# EAGLE board LTC_Balancer (EAGLE 5.06)
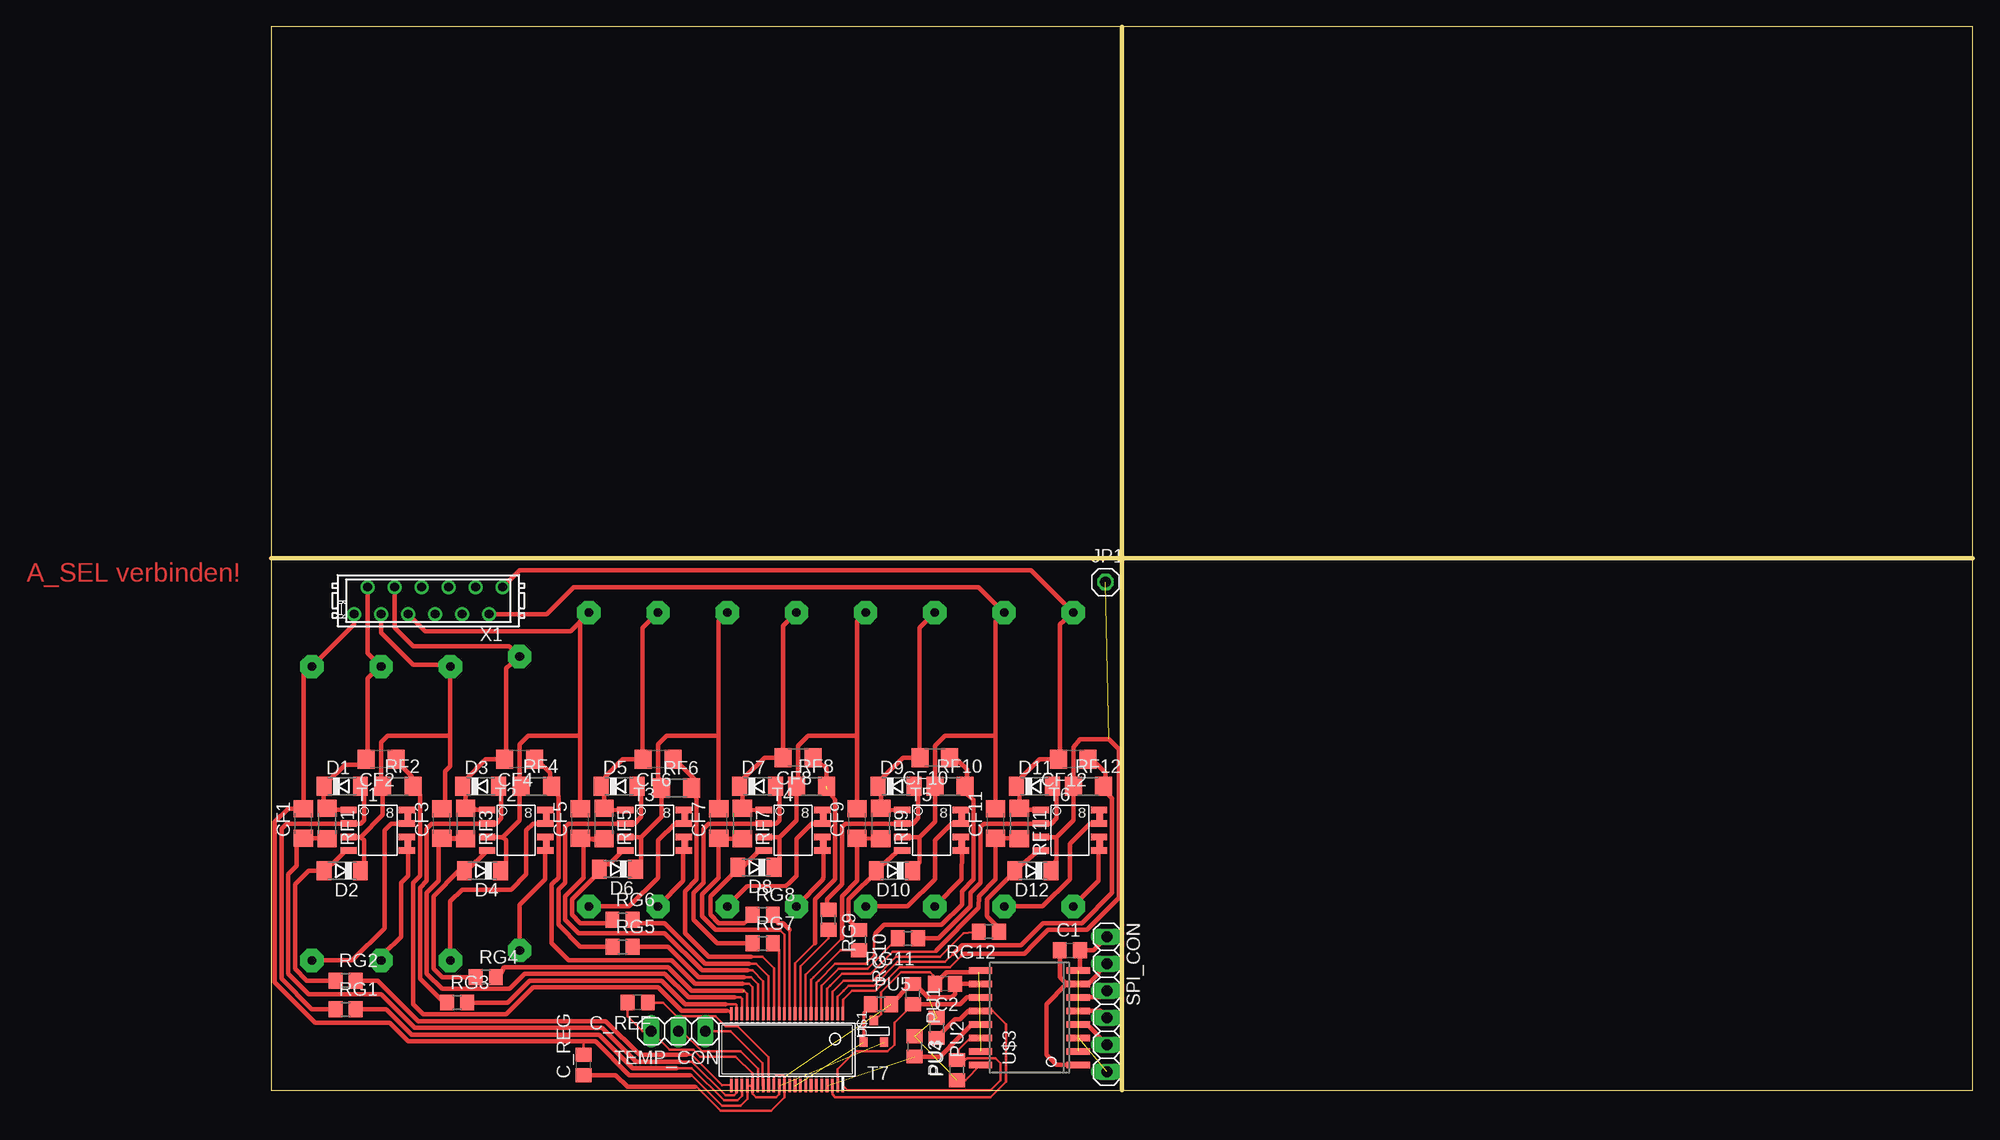
[diagram p0: board, top side]
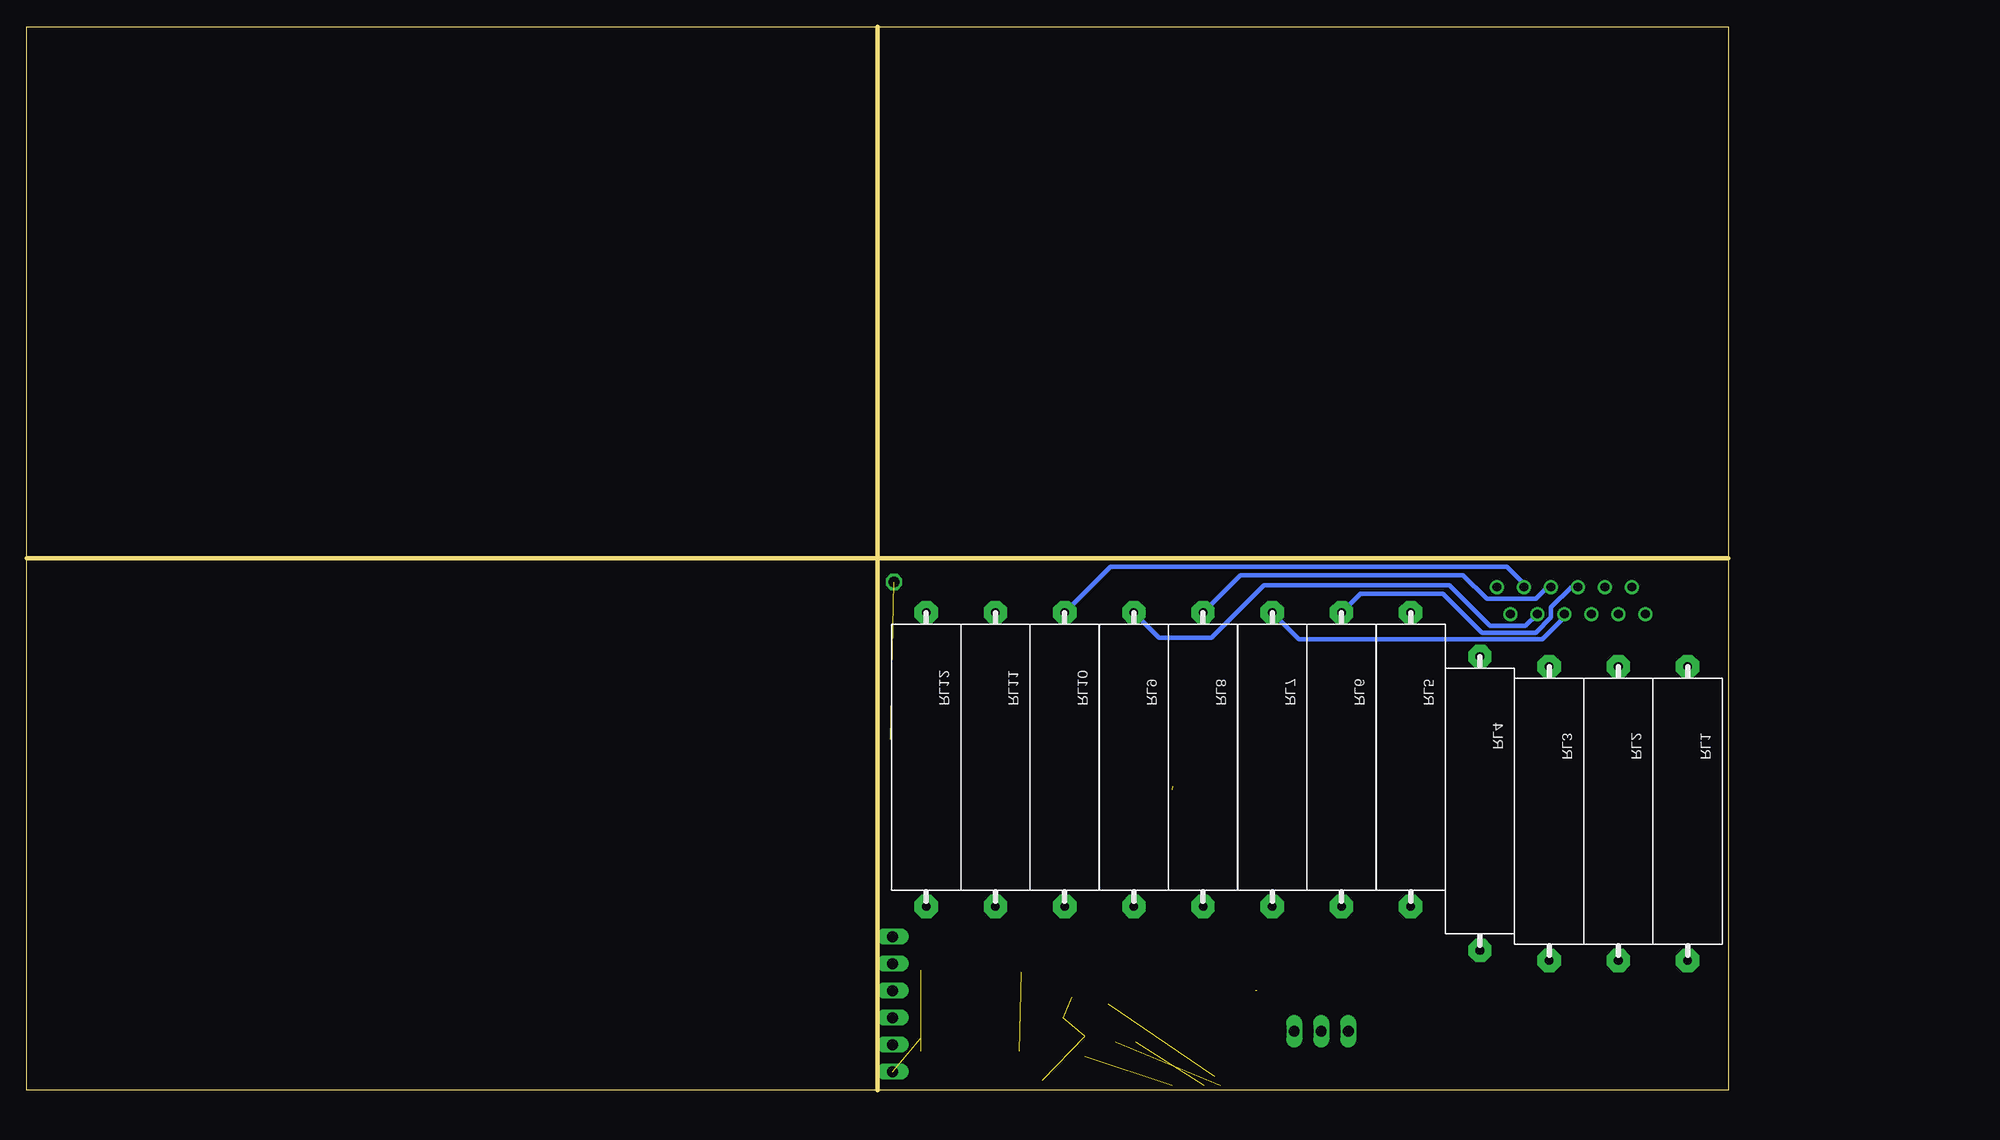
[diagram p1: board, bottom side, seen from below]

Size 160 x 100 mm. Coordinates in mm from the lower left corner, seen from the top.
Outline: 80,0 0,0 0,50
Outline: 80,0 160,0 160,50
Outline: 160,50 160,100 80,100
Outline: 80,100 0,100 0,50
Outline: 80,100 80,0
Outline: 0,50 160,50
Copper layers (1*16): Top 0.035mm / dielectric 1.5mm / Bottom 0.035mm
Design rules "default": minimum track width 10mil, minimum drill 24mil, track to track 8mil, track to pad 8mil, pad to pad 8mil, via to via 8mil, smd to smd 8mil, copper to edge 40mil, drill to drill 8mil, minimum pad ring 10mil, minimum via ring 8mil, stop-mask expansion 4mil, vias tented up to drill 0mil, thermal gap 10mil

## Footprints (pad centres in the part's own frame; a part is rotated, then mirrored left to right if it is on the bottom)
C0805 = smd 1.3 x 1.5: 1 -0.95,0; 2 0.95,0
C1206 = smd 1.6 x 1.8: 1 -1.4,0; 2 1.4,0
SOD80C = smd 1.4 x 1.8: A 1.7,0; C -1.7,0
1X01 = drill 1.016 octagon: 1 0,0
R0805 = smd 1.3 x 1.5: 1 -0.95,0; 2 0.95,0
R1206 = smd 1.6 x 1.803: 1 -1.422,0; 2 1.422,0
R_5W = drill 0.813 pad 2.184 octagon: 1 0.46,0; 2 28.08,0
1X06 = drill 1.016 long: 1 -6.35,0; 2 -3.81,0; 3 -1.27,0; 4 1.27,0; 5 3.81,0; 6 6.35,0
SO8 = smd 1.524 x 0.61: 1 1.067,4.445; 2 1.067,3.175; 3 1.067,1.905; 4 1.067,0.635; 5 6.553,0.635; 6 6.553,1.905; 7 6.553,3.175; 8 6.553,4.445 | smd 0.61 x 1.524: 9 6.635,3.703; 10 6.635,1.203
SOT-23 = smd 0.787 x 0.889: 1 0.025,-1.016; 2 -0.94,1.016; 3 0.991,1.016
1X03 = drill 1.016 long: 1 -2.54,0; 2 0,0; 3 2.54,0
SSOP44DL = smd 0.25 x 1.25: 1 1.1,0.435; 2 1.6,0.435; 3 2.1,0.435; 4 2.6,0.435; 5 3.1,0.435; 6 3.6,0.435; 7 4.1,0.435; 8 4.6,0.435; 9 5.1,0.435; 10 5.6,0.435; 11 6.1,0.435; 12 6.6,0.435; 13 7.1,0.435; 14 7.6,0.435; 15 8.1,0.435; 16 8.6,0.435; 17 9.1,0.435; 18 9.6,0.435; 19 10.1,0.435; 20 10.6,0.435; 21 11.1,0.435; 22 11.6,0.435; 23 11.6,7.185; 24 11.1,7.185; 25 10.6,7.185; 26 10.1,7.185; 27 9.6,7.185; 28 9.1,7.185; 29 8.6,7.185; 30 8.1,7.185; 31 7.6,7.185; 32 7.1,7.185; 33 6.6,7.185; 34 6.1,7.185; 35 5.6,7.185; 36 5.1,7.185; 37 4.6,7.185; 38 4.1,7.185; 39 3.6,7.185; 40 3.1,7.185; 41 2.6,7.185; 42 2.1,7.185; 43 1.6,7.185; 44 1.1,7.185
SO16 = smd 0.6 x 2.2: 1 1.905,1.75; 2 3.175,1.75; 3 4.445,1.75; 4 5.715,1.75; 5 6.985,1.75; 6 8.255,1.75; 7 9.525,1.75; 8 10.795,1.75; 9 10.795,10.95; 10 9.525,10.95; 11 8.255,10.95; 12 6.985,10.95; 13 5.715,10.95; 14 4.445,10.95; 15 3.175,10.95; 16 1.905,10.95
MICROMATCH-12 = drill 0.813 round: 1 6.985,1.27; 2 5.715,-1.27; 3 4.445,1.27; 4 3.175,-1.27; 5 1.905,1.27; 6 0.635,-1.27; 7 -0.635,1.27; 8 -1.905,-1.27; 9 -3.175,1.27; 10 -4.445,-1.27; 11 -5.715,1.27; 12 -6.985,-1.27

## Placement (x,y rotation side)
C1  100n  [C0805]  75.09,13.18 0 top
C2  100n  [C0805]  63.34,10 180 top
C_REF  1u  [C0805]  34.45,8.25 180 top
C_REG  1u  [C0805]  29.37,2.38 90 top
CF1  100n  [C1206]  3.02,25.08 90 top
CF2  100n  [C1206]  10.32,31.11 180 top
CF3  100n  [C1206]  16.03,25.08 90 top
CF4  100n  [C1206]  23.34,31.11 180 top
CF5  100n  [C1206]  29.05,25.08 90 top
CF6  100n  [C1206]  36.35,31.11 180 top
CF7  100n  [C1206]  42.07,25.08 90 top
CF8  100n  [C1206]  49.53,31.27 180 top
CF9  100n  [C1206]  55.09,25.08 90 top
CF10  100n  [C1206]  62.39,31.27 180 top
CF11  100n  [C1206]  68.1,25.08 90 top
CF12  100n  [C1206]  75.41,31.11 180 top
D1  [SOD80C]  6.67,28.57 0 top
D2  [SOD80C]  6.67,20.64 180 top
D3  [SOD80C]  19.68,28.57 0 top
D4  [SOD80C]  19.84,20.64 180 top
D5  [SOD80C]  32.7,28.57 0 top
D6  [SOD80C]  32.54,20.8 180 top
D7  [SOD80C]  45.72,28.57 0 top
D8  [SOD80C]  45.56,20.95 180 top
D9  [SOD80C]  58.74,28.57 0 top
D10  [SOD80C]  58.58,20.64 180 top
D11  [SOD80C]  71.75,28.57 0 top
D12  [SOD80C]  71.6,20.64 180 top
JP1  [1X01]  78.42,47.78 0 top
PU1  10k  [R0805]  60.33,9.05 270 top
PU2  100k  [R0805]  62.55,5.87 270 top
PU3  100k  [R0805]  60.48,4.13 270 top
PU4  100k  [R0805]  64.45,1.91 90 top
PU5  100k  [R0805]  57.31,8.1 0 top
RF1  100  [R1206]  5.24,25.08 270 top
RF2  100  [R1206]  11.91,28.57 0 top
RF3  100  [R1206]  18.26,25.08 270 top
RF4  100  [R1206]  24.92,28.57 0 top
RF5  100  [R1206]  31.27,25.08 270 top
RF6  100  [R1206]  38.1,28.42 0 top
RF7  100  [R1206]  44.29,25.08 270 top
RF8  100  [R1206]  50.8,28.57 0 top
RF9  100  [R1206]  57.31,25.08 270 top
RF10  100  [R1206]  63.82,28.57 0 top
RF11  100  [R1206]  70.33,25.08 270 top
RF12  100  [R1206]  76.83,28.57 0 top
RG1  3k3  [R0805]  6.99,7.62 0 top
RG2  3k3  [R0805]  6.99,10.32 0 top
RG3  3k3  [R0805]  17.46,8.26 0 top
RG4  3k3  [R0805]  20.16,10.64 0 top
RG5  3k3  [R0805]  33.02,13.49 0 top
RG6  3k3  [R0805]  33.02,16.03 0 top
RG7  3k3  [R0805]  46.2,13.81 0 top
RG8  3k3  [R0805]  46.2,16.51 0 top
RG9  3k3  [R0805]  52.39,16.03 270 top
RG10  3k3  [R0805]  55.24,14.13 270 top
RG11  3k3  [R0805]  59.85,14.29 180 top
RG12  3k3  [R0805]  67.47,14.92 180 top
RL1  R_5W  [R_5W]  3.81,11.75 90 top
RL2  R_5W  [R_5W]  10.32,11.75 90 top
RL3  R_5W  [R_5W]  16.83,11.75 90 top
RL4  R_5W  [R_5W]  23.34,12.7 90 top
RL5  R_5W  [R_5W]  29.85,16.83 90 top
RL6  R_5W  [R_5W]  36.35,16.83 90 top
RL7  R_5W  [R_5W]  42.86,16.83 90 top
RL8  R_5W  [R_5W]  49.37,16.83 90 top
RL9  R_5W  [R_5W]  55.88,16.83 90 top
RL10  R_5W  [R_5W]  62.39,16.83 90 top
RL11  R_5W  [R_5W]  68.9,16.83 90 top
RL12  R_5W  [R_5W]  75.41,16.83 90 top
SPI_CON  [1X06]  78.58,8.1 270 top
T1  IRF_7104  [SO8]  6.19,21.91 0 top
T2  IRF_7104  [SO8]  19.21,21.91 0 top
T3  IRF_7104  [SO8]  32.23,21.91 0 top
T4  IRF_7104  [SO8]  45.24,21.91 0 top
T5  IRF_7104  [SO8]  58.26,21.91 0 top
T6  IRF_7104  [SO8]  71.28,21.91 0 top
T7  [SOT-23]  56.67,5.56 180 top
TEMP_CON  [1X03]  38.26,5.56 180 top
U$1  LTC6802-2  [SSOP44DL]  54.85,7.63 180 top
U$3  ADUM1401  [SO16]  77.63,0.48 90 top
X1  MICROMATCH-12  [MICROMATCH-12]  14.76,46.04 180 top

## Library data of the parts
C1 C2 C_REF C_REG CF1-CF12 PU1-PU5 RF1-RF12 RG1-RG12 = rcl
D1-D12 = diode
JP1 SPI_CON TEMP_CON = pinhead
RL1-RL12 = R_Power
T1-T6 = IRF_7104
T7 = zetex
U$1 = LTC6802
U$3 = ADuM1401
X1 = con-amp-micromatch

## Nets
+5V: C2.1 C_REG.1 PU1.1 PU2.1 PU3.1 PU4.1 PU5.2 U$1.31 U$1.33 U$3.10 U$3.16
A0: U$1.37
A1: U$1.38
A2: U$1.39
A3: U$1.40
ASD: RL5.1 T3.7
BK2: CF2.2 D1.C RF1.1 RL2.2 T1.1 X1.2
BK3: CF3.2 D2.C RF2.1 RL3.2 T1.3 X1.3
BK4: CF4.2 D3.C RF3.1 RL4.2 T2.1 X1.4
BK5: CF5.2 D4.C RF4.1 RL5.2 T2.3 X1.5
BK6: CF6.2 D5.C RF5.1 RL6.2 T3.1 X1.6
BK7: CF7.2 D6.C RF6.1 RL7.2 T3.3 X1.7
BK8: CF8.2 D7.C RF7.1 RL8.2 T4.1 X1.8
BK9: CF9.2 D8.C RF8.1 RL9.2 T4.3 X1.9
BK10: CF10.2 D9.C RF9.1 RL10.2 T5.1 X1.10
BK11: CF11.2 D10.C RF10.1 RL11.2 T5.3 X1.11
BK12: CF12.2 D11.C RF11.1 RL12.2 T6.1 X1.12
C1: CF1.1 RF1.2 U$1.24
C2: CF2.1 RF2.2 U$1.22
C3: CF3.1 RF3.2 U$1.20
C4: CF4.1 RF4.2 U$1.18
C5: CF5.1 RF5.2 U$1.16
C6: CF6.1 RF6.2 U$1.14
C7: CF7.1 RF7.2 U$1.12
C8: CF8.1 RF8.2 U$1.10
C9: CF9.1 RF9.2 U$1.8
C10: CF10.1 RF10.2 U$1.6
C11: CF11.1 RF11.2 U$1.4
C12: CF12.1 RF12.2 U$1.2
CS: SPI_CON.6 U$3.3
CSBI: PU4.2 U$1.44 U$3.14
GND_MC: C1.2 SPI_CON.1 U$3.2 U$3.8
GPIO1: PU5.1 T7.3 U$1.35
MISO: SPI_CON.3 U$3.6
MOSI: SPI_CON.4 U$3.5
N$2: TEMP_CON.1 U$1.29
N$3: C_REF.1 U$1.30
N$4: TEMP_CON.2 U$1.28
N$5: RL3.1 T2.7
N$6: RL4.1 T2.5
N$7: C2.2 T7.1 U$3.9 U$3.15
N$8: RL1.1 T1.7
N$9: RL2.1 T1.5
N$10: RL6.1 T3.5
N$11: RL7.1 T4.7
N$12: RL8.1 T4.5
N$13: RL9.1 T5.7
N$14: RL10.1 T5.5
N$15: RL11.1 T6.7
N$16: RL12.1 T6.5
N$17: D1.A RG1.1 T1.2
N$23: D2.A RG2.1 T1.4
N$55: D3.A RG3.1 T2.2
N$56: D4.A RG4.1 T2.4
N$57: D5.A RG5.1 T3.2
N$58: D7.A RG7.1 T4.2
N$59: D6.A RG6.1 T3.4
N$60: D8.A RG8.1 T4.4
N$61: D9.A RG9.1 T5.2
N$62: D10.A RG10.1 T5.4
N$63: D11.A RG11.1 T6.2
N$64: D12.A RG12.1 T6.4
S1: RG1.2 U$1.25
S2: RG2.2 U$1.23
S3: RG3.2 U$1.21
S4: RG4.2 U$1.19
S5: RG5.2 U$1.17
S6: RG6.2 U$1.15
S7: RG7.2 U$1.13
S8: RG8.2 U$1.11
S9: RG9.2 U$1.9
S10: RG10.2 U$1.7
S11: RG11.2 U$1.5
S12: RG12.2 U$1.3
SCK: SPI_CON.5 U$3.4
SCKI: PU3.2 U$1.41 U$3.13
SDI: PU2.2 U$1.42 U$3.12
SDO: PU1.2 U$1.43 U$3.11
V+: D12.C JP1.1 RF12.1 T6.3 U$1.1
V-: C_REF.2 C_REG.2 CF1.2 RL1.2 T7.2 TEMP_CON.3 U$1.26 U$1.27 U$1.32 X1.1
VCC_MC: C1.1 SPI_CON.2 U$3.1 U$3.7

## Tracks (layer width: path | path; a pad name or v marks a point on that pad's centre or on a via)
+5V  (4 unrouted)
  Top 0.254: PU4.1 65.25,0.95 U$3.16 | U$1.31 47.25,1.21 47.47,1.43 48.1,1.43 48.25,1.28 U$1.33 48.25,-0.62 48.26,-0.64 46.99,-1.91 42.23,-1.91 40.01,0.32 39.85,0.32
  Top 0.406: C2.1 U$3.10 | C2.1 | C2.1 64.29,9.05 63.98,8.73 61.75,8.73 60.49,10 PU1.1 60.16,10 PU5.2 | C_REG.1 32.38,1.43 33.5,0.32 39.85,0.32
ASD
  Top 0.406: RL5.1 33.64,17.29 36.35,20 36.35,23.5 37.94,25.08 T3.7
BK2
  Top 0.406: T1.1 5.07,26.35 RF1.1 5.09,26.5 4.92,26.67 4.92,28.46 D1.C 4.81,28.59 6.51,30.16 6.96,30.61 8.73,30.61 CF2.2 9.05,31.25 9.05,38.73 10.14,39.83 RL2.2 9.05,41.1 X1.2
BK3
  Top 0.406: 8.41,23.81 10.48,25.88 RF2.1 10.17,29.06 10.32,29.21 10.32,32.7 10.95,33.34 16.83,33.34 | 8.41,23.81 T1.3 | 8.41,23.81 8.73,23.5 8.73,21.16 D2.C | 16.83,33.34 16.83,30.48 16.35,30 16.35,26.83 16.03,26.51 CF3.2 | 16.83,33.34 RL3.2 16.65,40.01 14.92,40.01 13.34,40.01 10.32,43.02 X1.3
BK4
  Top 0.406: T2.1 19.21,26.35 19.06,26.5 RF3.1 18.26,27.62 18.14,28.05 D3.C 18.26,28.69 18.26,29.21 20.16,31.11 CF4.2 22.07,31.3 22.07,39.69 23.34,40.8 RL4.2 22.36,41.75 13.34,41.75 11.59,43.5 X1.4
BK5
  Top 0.406: 21.75,23.81 T2.3 | 21.75,23.81 22.07,23.5 22.07,20.84 D4.C | 21.75,23.81 23.34,25.4 23.34,28.41 RF4.1 23.5,29.06 23.34,29.21 | 23.34,29.21 23.65,28.89 | 23.34,29.21 23.34,32.54 24.13,33.34 29.05,33.34 | 29.05,33.34 29.05,29.53 CF5.2 | 29.05,33.34 29.05,43.97 29.84,44.93 RL5.2 28.12,43.18 14.45,43.18 X1.5
BK6
  Top 0.406: RL6.2 36.35,44.93 34.92,43.5 34.92,31.4 CF6.2 33.02,31.11 31.43,29.53 31.43,28.85 D5.C 31.32,28.21 31.27,27.78 RF5.1 31.9,26.35 32.54,26.35 T3.1
  Bottom 0.406: X1.6 14.76,47.31 16.67,45.4 16.67,44.45 18.1,43.02 23.18,43.02 26.83,46.67 34.59,46.67 RL6.2
BK7
  Top 0.406: D6.C 34.56,21.39 34.77,21.59 34.77,23.81 | 34.77,23.81 T3.3 | 34.77,23.81 36.68,25.72 RF6.1 36.84,29.06 36.35,29.37 36.35,32.54 37.15,33.34 42.07,33.34 | RL7.2 42.7,44.77 42.07,44.13 42.07,33.34 | 42.07,33.34 CF7.2
  Bottom 0.406: X1.7 15.4,44.45 17.46,42.39 40.34,42.39 RL7.2
BK8
  Top 0.406: T4.1 45.88,26.35 44.93,26.35 RF7.1 44.29,28.1 44.18,28.05 D7.C 44.45,28.85 44.45,29.37 46.35,31.27 CF8.2 48.13,43.67 RL8.2
  Bottom 0.406: X1.8 16.99,47.31 18.1,46.2 22.7,46.2 24.92,48.42 45.86,48.42 RL8.2
BK9
  Top 0.406: 47.78,23.81 49.38,25.41 RF8.1 49.38,29.06 49.53,29.21 49.53,32.38 50.48,33.34 55.09,33.34 | 47.78,23.81 T4.3 | 47.78,23.81 47.78,21.32 D8.C | 55.09,33.34 55.09,26.64 CF9.2 | 55.09,33.34 55.09,44.11 RL9.2
  Bottom 0.406: X1.9 | X1.9 19.05,43.66 22.38,43.66 26.19,47.47 43.66,47.47 48.58,42.55 53.52,42.55 RL9.2
BK10
  Top 0.406: RL10.2 62.37,44.91 60.96,43.5 60.96,31.25 CF10.2 59.37,31.27 57.47,29.37 57.15,29.16 D9.C 57.51,28.69 57.31,28.1 RF9.1 57.95,26.35 59.21,26.35 T5.1
  Bottom 0.406: X1.10 19.21,47.62 20.8,49.21 58.08,49.21 RL10.2
BK11
  Top 0.406: 60.96,23.81 62.4,25.25 RF10.1 62.24,28.74 62.39,28.89 62.39,32.38 63.34,33.34 68.1,33.34 | 60.96,23.81 T5.3 | D10.C 60.44,21.23 60.96,21.43 60.96,23.81 | 68.1,33.34 CF11.2 | 68.1,33.34 68.1,44.11 RL11.2 66.5,47.31 28.42,47.31 25.88,44.77 X1.11
BK12
  Top 0.406: T6.1 70.8,26.35 RF11.1 70.33,27.99 D11.C 70.21,29.1 72.23,31.11 CF12.2 74.14,31.09 74.14,43.81 75.39,44.91 RL12.2 73.01,47.31 73.03,47.31 71.44,48.9 23.34,48.9 X1.12 | X1.12
C1
  Top 0.254: 38.42,2.7 39.53,2.7 42.7,-0.48 43.5,-0.48 43.75,-0.23 U$1.24
  Top 0.406: RF1.2 4.9,23.68 CF1.1 2.38,23.5 2.38,21.11 1.59,20.32 1.59,10.95 3.33,9.21 3.49,9.05 10.32,9.05 13.49,5.87 31.11,5.87 34.29,2.7 38.42,2.7
C2
  Top 0.254: 42.86,7.46 42.98,7.46 U$1.22
  Top 0.406: RF2.2 12.86,28.09 | RF2.2 13.18,28.57 13.97,27.78 13.97,20.16 13.34,19.53 13.34,10 13.34,8.1 14.29,7.14 22.07,7.14 24.61,9.68 36.35,9.68 38.58,7.46 42.86,7.46 | CF2.1 11.91,30.8 13.18,29.53 13.18,28.74 RF2.2
C3
  Top 0.254: U$1.20 44.25,8.62 44.13,8.73 43.55,8.73
  Top 0.406: CF3.1 18.55,23.68 RF3.2 16.2,23.66 15.72,23.18 15.72,19.68 14.61,18.57 14.61,10.95 16.03,9.53 22.38,9.53 23.81,10.95 36.99,10.95 39.21,8.73 43.55,8.73
C4
  Top 0.254: U$1.18 45.25,9.68 44.93,10 44.29,10 | 44.29,10
  Top 0.406: CF4.1 25.05,30.98 26.19,29.84 26.19,28.73 RF4.2 26.35,28.42 26.99,27.62 26.99,20 26.35,19.37 26.35,13.81 27.94,12.22 37.62,12.22 39.85,10 44.29,10
C5
  Top 0.254: U$1.16 46.25,10.27 45.24,11.27 44.77,11.27
  Top 0.406: CF5.1 31.89,23.36 RF5.2 29.53,23.66 29.37,23.5 29.37,20 27.62,18.26 27.62,16.03 28.89,14.76 36.2,14.76 36.99,14.76 40.48,11.27 44.77,11.27
C6
  Top 0.254: U$1.14 47.25,11.49 46.2,12.54 45.09,12.54
  Top 0.406: CF6.1 38.39,30.67 39.85,29.21 39.85,28.74 RF6.2 39.68,28.42 40.01,27.3 40.01,19.84 38.89,18.73 38.89,15.88 | 38.89,15.88 | 38.89,15.88 38.89,14.76 41.12,12.54 45.09,12.54
C7
  Top 0.254: U$1.12 48.25,11.13 48.26,11.13 48.26,14.61 47.78,15.08
  Top 0.406: RF7.2 43.04,23.66 CF7.1 42.07,20 40.48,18.41 40.48,16.35 41.75,15.08 47.78,15.08
C8  (1 unrouted)
  Top 0.254: U$1.10 49.25,11.94 51.12,13.81
  Top 0.406: RF8.2 52.22,30.3 CF8.1 50.61,31.78 50.64,31.75 | 52.23,29.05 52.23,28.26 53.02,27.3 53.02,19.84 51.12,17.94 51.12,17.62 51.12,13.81
C9
  Top 0.254: U$1.8 50.25,10.88 53.66,14.29
  Top 0.406: RF9.2 56.38,23.66 CF9.1 55.09,19.68 53.66,18.26 53.66,16.51 53.66,16.03 53.66,14.29
C10
  Top 0.254: U$1.6 51.25,10.13 51.44,10.32 | 51.44,10.32 | 51.44,10.32 53.02,11.91 55.88,11.91 56.67,12.7 56.67,14.61 56.83,14.76
  Top 0.406: CF10.1 64.42,31.14 65.41,30.16 65.41,28.89 RF10.2 65.24,27.95 66.04,27.3 66.04,19.84 64.93,18.73 | 64.93,18.73 | 64.93,18.73 64.93,17.46 63.02,15.56 57.63,15.56 56.83,14.76
C11
  Top 0.254: U$1.4 52.25,9.54 52.55,9.84 | 52.55,9.84 | 52.55,9.84 53.66,10.95 56.36,10.95 58.42,13.02 62.55,13.02 62.55,13.18
  Top 0.406: RF11.2 70.94,23.68 CF11.1 68.1,19.84 66.52,18.26 66.52,17.14 62.55,13.18
C12
  Top 0.254: U$1.2 53.25,8.8 53.82,9.37 | 53.82,9.37 | 53.82,9.37 54.29,9.84 56.67,9.84 58.9,12.06 63.34,12.06 64.14,12.86
  Top 0.406: CF12.1 77.28,30.98 78.42,29.84 78.42,28.89 RF12.2 78.73,27.79 79.06,27.46 79.06,18.57 76.2,15.72 72.55,15.72 71.28,14.45 | 71.28,14.45 | 71.28,14.45 70.48,13.65 64.93,13.65 64.14,12.86
CS  (1 unrouted)
CSBI
  Top 0.254: U$3.14 65.72,4.92 64.61,3.81 64.61,3.01 PU4.2 65.24,2.85 65.41,3.02 68.1,3.02 68.58,2.54 68.58,0.95 67.63,0 54.19,0 U$1.44
GND_MC  (1 unrouted)
  Top 0.406: U$3.8 76.04,11.43 C1.2 77.31,13.18 SPI_CON.1
GPIO1  (1 unrouted)
  Top 0.305: PU5.1 56.36,7.94 55.72,7.3 55.72,4.58 T7.3
  Top 0.406: T7.3 55.72,4.58
MISO
  Top 0.406: U$3.6 77.95,8.73 SPI_CON.3
MOSI
  Top 0.406: U$3.5 77.95,7.46 SPI_CON.4
N$2
  Top 0.254: TEMP_CON.1 43.18,5.56 46.2,2.54 46.2,0.49 U$1.29
N$3
  Top 0.254: C_REF.1 36.83,8.25 38.1,6.99 41.75,6.99 42.7,6.03 43.81,6.03 46.75,3.1 U$1.30
N$4
  Top 0.254: TEMP_CON.2 38.58,5.56 40.48,3.65 44.13,3.65 45.75,2.04 U$1.28
N$5
  Top 0.406: T2.7 24.61,25.08 23.97,24.45 23.97,20.32 22.53,18.88 17.92,18.88 16.83,17.78 RL3.1
N$6
  Top 0.406: RL4.1 23.34,17.46 25.72,19.84 25.72,21.95 T2.5
N$7  (1 unrouted)
  Top 0.254: T7.1 56.74,6.57 57.31,7.14 57.31,9.21 59.21,11.11 61.91,11.11 62.23,10.79 62.23,10.16 C2.2
  Top 0.406: U$3.9 66.52,11.11 63.5,11.11 C2.2
N$8
  Top 0.406: RL1.1 7.6,12.21 10.64,15.24 10.64,24.45 11.27,25.08 T1.7
N$9
  Top 0.406: RL2.1 10.32,12.7 11.59,13.81 12.22,14.45 12.22,19.53 12.86,20.16 12.86,22.43 T1.5
N$10
  Top 0.406: RL6.1 36.35,17.3 38.73,19.68 38.73,22.43 T3.5
N$11
  Top 0.406: RL7.1 44.75,19.19 48.42,19.21 48.74,19.53 49.37,20.16 49.37,23.65 50.8,25.08 T4.7
N$12
  Top 0.406: RL8.1 51.9,19.83 51.91,20.16 51.91,22.34 T4.5
N$13
  Top 0.406: RL9.1 59.83,17.29 62.39,19.84 62.39,23.5 63.98,25.08 T5.7
N$14
  Top 0.406: RL10.1 64.91,19.83 64.93,22.7 64.93,22.66 T5.5
N$15
  Top 0.406: RL11.1 72.53,17.29 75.09,19.84 75.09,23.18 76.99,25.08 T6.7
N$16
  Top 0.406: RL12.1 75.39,17.29 77.79,19.68 77.79,22.5 T6.5
N$17
  Top 0.406: RG1.1 3.81,7.62 0.95,10.47 0.95,24.61 1.43,25.08 T1.2 8.41,25.08 8.73,25.4 8.73,27.78 8.37,28.46 D1.A
N$23
  Top 0.406: T1.4 6.99,22.54 5.71,21.27 5.44,21.27 D2.A 3.49,20.64 2.22,19.37 2.22,11.43 3.33,10.32 RG2.1
N$55
  Top 0.406: D3.A 21.43,28.46 21.27,28.1 21.59,27.94 21.59,25.56 21.11,25.08 T2.2 15.08,25.08 14.61,24.61 14.61,19.68 13.97,19.05 13.97,10.48 16.03,8.41 16.35,7.94 RG3.1
N$56
  Top 0.406: T2.4 18.37,20.64 D4.A 17.62,20.64 15.24,18.26 15.24,11.43 16.03,10.64 RG4.1
N$57
  Top 0.406: D5.A 34.4,28.62 34.77,27.78 34.77,25.72 34.13,25.08 T3.2 27.94,25.08 27.62,24.77 27.62,19.53 26.99,18.89 26.99,15.56 29.05,13.49 RG5.1
N$58
  Top 0.406: D7.A 47.74,28.3 47.78,27.94 47.78,25.4 47.47,25.08 T4.2 41.12,25.08 40.64,24.61 40.64,19.53 39.69,18.57 39.69,16.03 41.92,13.8 RG7.1
N$59
  Top 0.406: 33.81,22.54 T3.4 33.02,22.54 31.75,21.27 31.39,21.27 D6.A 30.96,20.64 28.26,17.94 28.26,16.51 29.05,15.72 31.59,15.72 31.91,16.03 RG6.1
N$60
  Top 0.406: T4.4 45.88,22.54 44.29,20.95 D8.A 43.81,20.8 41.27,18.26 41.27,16.51 42.07,15.72 44.45,15.72 45.09,16.2 RG8.1
N$61
  Top 0.406: D9.A 60.91,28.3 60.8,27.78 60.8,25.56 60.33,25.08 T5.2 53.98,25.08 53.66,24.77 53.66,19.37 52.23,17.94 52.23,16.98 RG9.1
N$62
  Top 0.406: T5.4 58.78,22.38 D10.A 57.15,20.8 54.29,17.94 54.29,16.51 54.29,16.03 RG10.1
N$63
  Top 0.406: D11.A 73.61,28.62 73.82,27.78 73.82,25.56 73.34,25.08 T6.2 66.99,25.08 66.67,24.77 66.67,19.53 65.72,18.57 65.72,17.3 62.71,14.28 RG11.1
N$64
  Top 0.406: T6.4 72.12,22.54 D12.A 69.85,20.48 67.31,17.94 67.31,16.35 68.42,15.24 RG12.1
S1
  Top 0.254: 38.1,2.06 39.53,2.06 42.55,-0.95 43.81,-0.95 44.25,-0.52 U$1.25
  Top 0.406: RG1.2 10.79,7.62 13.18,5.24 23.18,5.24 28.1,5.24 30.8,5.24 33.97,2.06 38.1,2.06
S2
  Top 0.254: 39.05,3.33 39.53,3.33 42.39,0.48 43.18,0.51 U$1.23
  Top 0.406: RG2.2 8.89,10.32 10,10.32 13.81,6.51 31.43,6.51 34.61,3.33 39.05,3.33
S3
  Top 0.254: U$1.21 43.75,8.01 43.66,8.1 42.7,8.1
  Top 0.406: RG3.2 22.23,8.26 | 22.23,8.26 | 22.23,8.26 24.29,10.32 36.67,10.32 38.89,8.1 42.7,8.1
S4  (1 unrouted)
  Top 0.254: U$1.19 44.75,9.07 44.45,9.37
  Top 0.406: RG4.2 21.11,10.16 21.91,11.59 37.31,11.59 39.53,9.37 44.29,9.37
S5
  Top 0.254: U$1.17 45.75,9.97 45.09,10.64 44.45,10.64
  Top 0.406: RG5.2 37.31,13.49 40.16,10.64 44.45,10.64
S6
  Top 0.254: U$1.15 46.75,10.72 45.56,11.91 44.93,11.91
  Top 0.406: RG6.2 33.97,15.72 36.99,15.72 40.8,11.91 44.93,11.91
S7
  Top 0.254: U$1.13 47.75,13.21 RG7.2
S8
  Top 0.254: U$1.11 48.75,15.07 48.74,15.08
  Top 0.406: RG8.2 47.15,16.35 47.62,15.72 48.1,15.72 48.74,15.08
S9
  Top 0.254: U$1.9 49.75,11.65 52.39,14.29 RG9.2
S10
  Top 0.254: U$1.7 50.75,10.37 50.96,10.64 | 50.96,10.64 | 50.96,10.64 53.5,13.18 RG10.2
  Top 0.406: RG10.2
S11
  Top 0.254: U$1.5 51.75,9.84 53.34,11.43 56.04,11.43 RG11.2
S12
  Top 0.254: U$1.3 52.75,9.25 53.82,10.32 56.52,10.32 58.74,12.54 62.87,12.54 65.09,14.76 RG12.2
SCK
  Top 0.406: U$3.4 76.68,6.19 SPI_CON.5
SCKI  (1 unrouted)
  Top 0.406: U$3.13 65.88,6.19 64.61,4.92 62.87,3.17 PU3.2
SDI
  Top 0.254: U$1.42 52.75,-0.36 53.02,-0.64 67.63,-0.64 69.06,0.79 69.06,6.19 67.79,7.46 U$3.12
  Top 0.406: U$3.12 65.56,7.46 64.77,6.67 64.29,6.67 PU2.2
SDO
  Top 0.254: U$1.43 53.25,1.97 54.93,3.65 57.94,3.65 58.58,4.29 58.58,6.35 PU1.2
  Top 0.406: U$3.11 65.41,8.73 64.77,8.1 PU1.2
V+  (1 unrouted)
  Top 0.254: U$1.1 53.75,8.5 | 53.75,8.5 53.82,8.57 | 64.93,12.7 63.82,11.59 59.05,11.59 56.83,9.37 54.61,9.37 53.75,8.5
  Top 0.406: 73.82,23.81 75.41,25.41 RF12.1 75.41,32.23 76.04,33.02 78.74,33.02 79.69,32.07 79.69,18.1 76.68,15.08 73.03,15.08 71.75,13.81 | 73.82,23.81 T6.3 | 73.82,23.81 73.82,21.64 D12.C | 71.75,13.81 | 71.75,13.81 70.8,12.86 65.09,12.86 64.93,12.7
V-  (1 unrouted)
  Top 0.254: 44.77,0.42 U$1.26 | 39.37,1.43 39.53,1.43 42.39,-1.43 44.13,-1.43 44.77,-0.79 44.77,0.42 | 44.77,0.42 45.23,0.42 U$1.27 | U$1.27 45.25,-0.32 45.56,-0.64 47.47,-0.64 47.75,-0.35 U$1.32 | U$1.27 45.24,1.59 43.66,3.17 40.32,3.17 39.69,3.81 37.47,3.81 TEMP_CON.3 34.92,5.56 | 34.92,5.56 33.5,6.99 C_REF.2 | 34.92,5.56 | C_REG.2 29.37,4.45 29.53,4.6
  Top 0.406: 39.37,1.43 33.66,1.43 30.48,4.6 29.53,4.6 25.72,4.6 12.86,4.6 11.11,6.35 4.13,6.35 0.32,10.16 0.32,25.24 1.56,26.48 CF1.2 3.02,39.21 3.63,39.83 RL1.2 7.78,43.8 X1.1 | 39.37,1.43
VCC_MC
  Top 0.406: C1.1 74.14,10.63 74.77,10 | 74.77,10 U$3.7 76.83,10 77.79,10.95 77.79,11.11 SPI_CON.2 | U$3.1 73.82,2.38 72.87,3.33 72.87,8.1 74.77,10

## Text on the board
Top: A_SEL verbinden!